# Altium PCB Therm_Expand_GND.PcbDoc
Units mm, origin at the board's own origin, x right, y up, seen from the top; angles counter-clockwise.
Board outline 68.53 x 50.17 mm, 2 copper layers (Top Layer, Bottom Layer); 8 components, 1 nets, 92 pads, 0 vias.
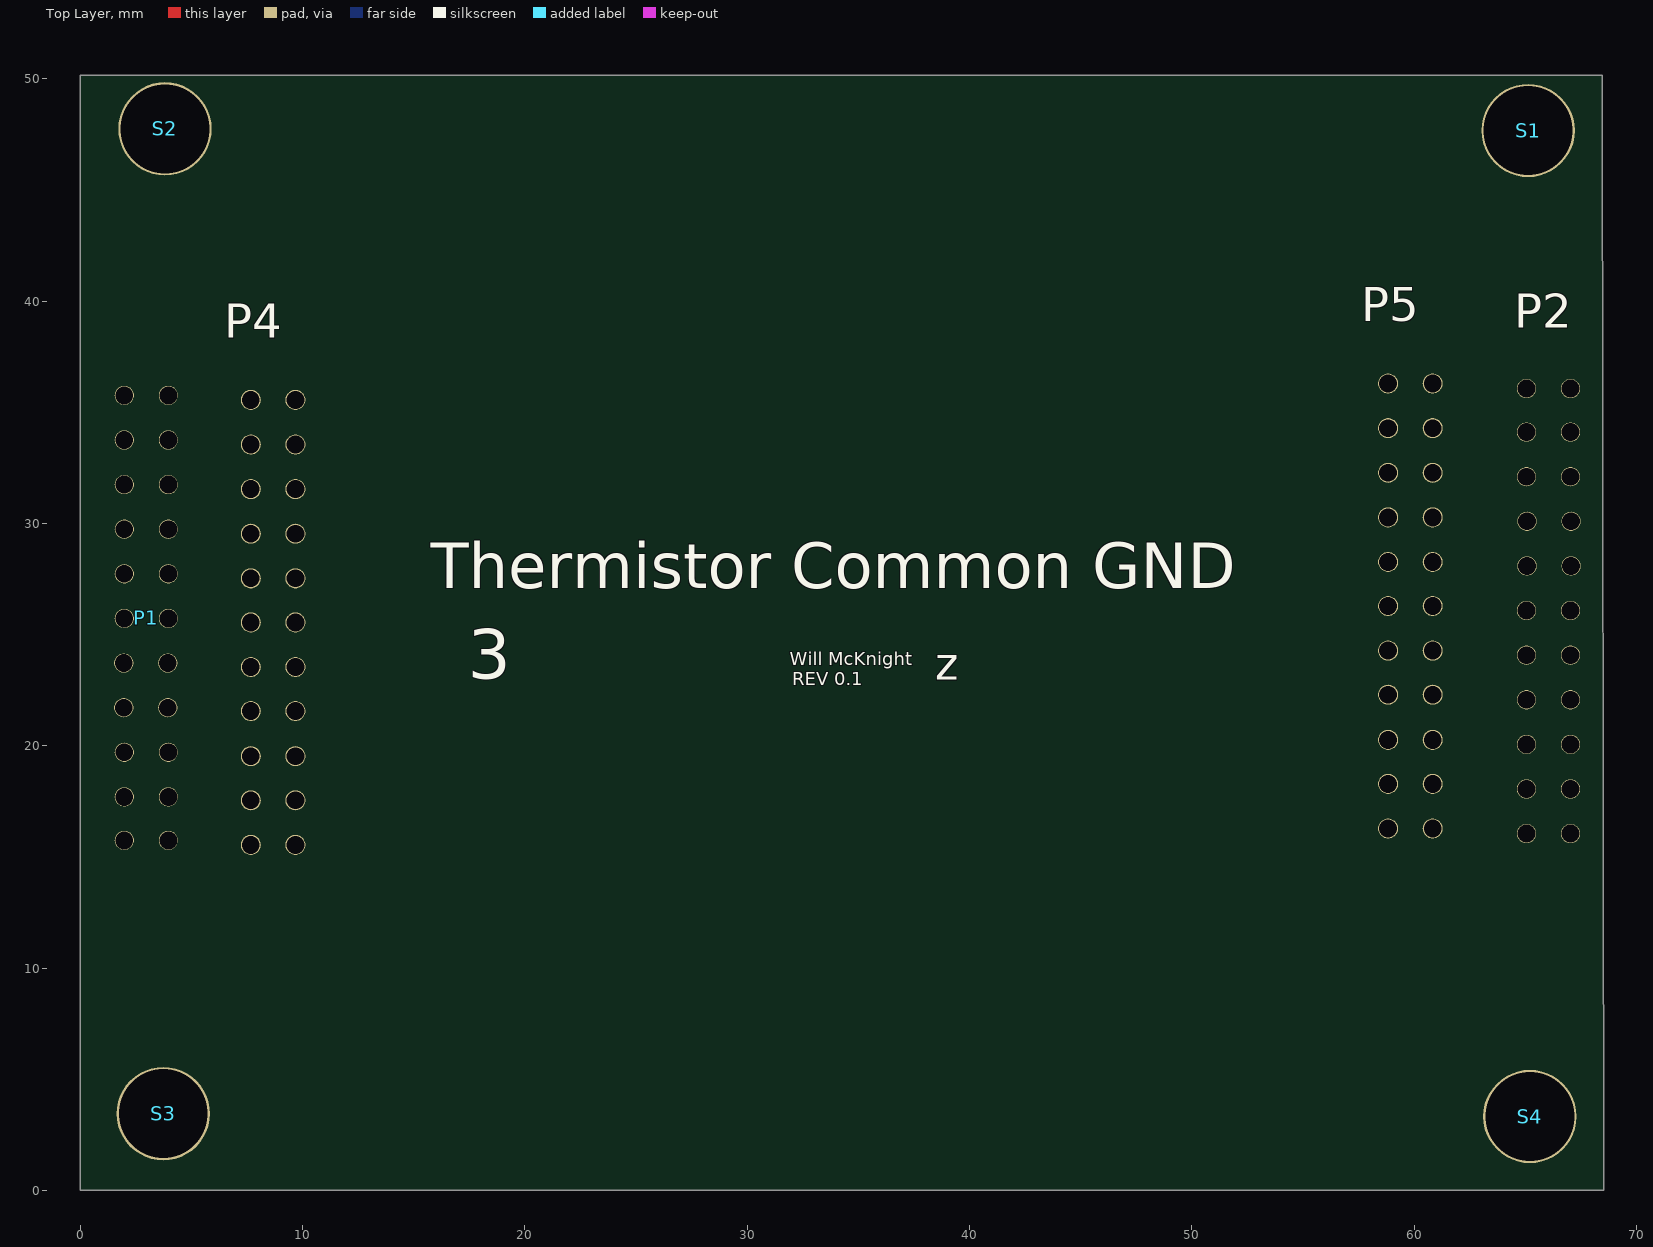
[diagram p0: Top Layer view]
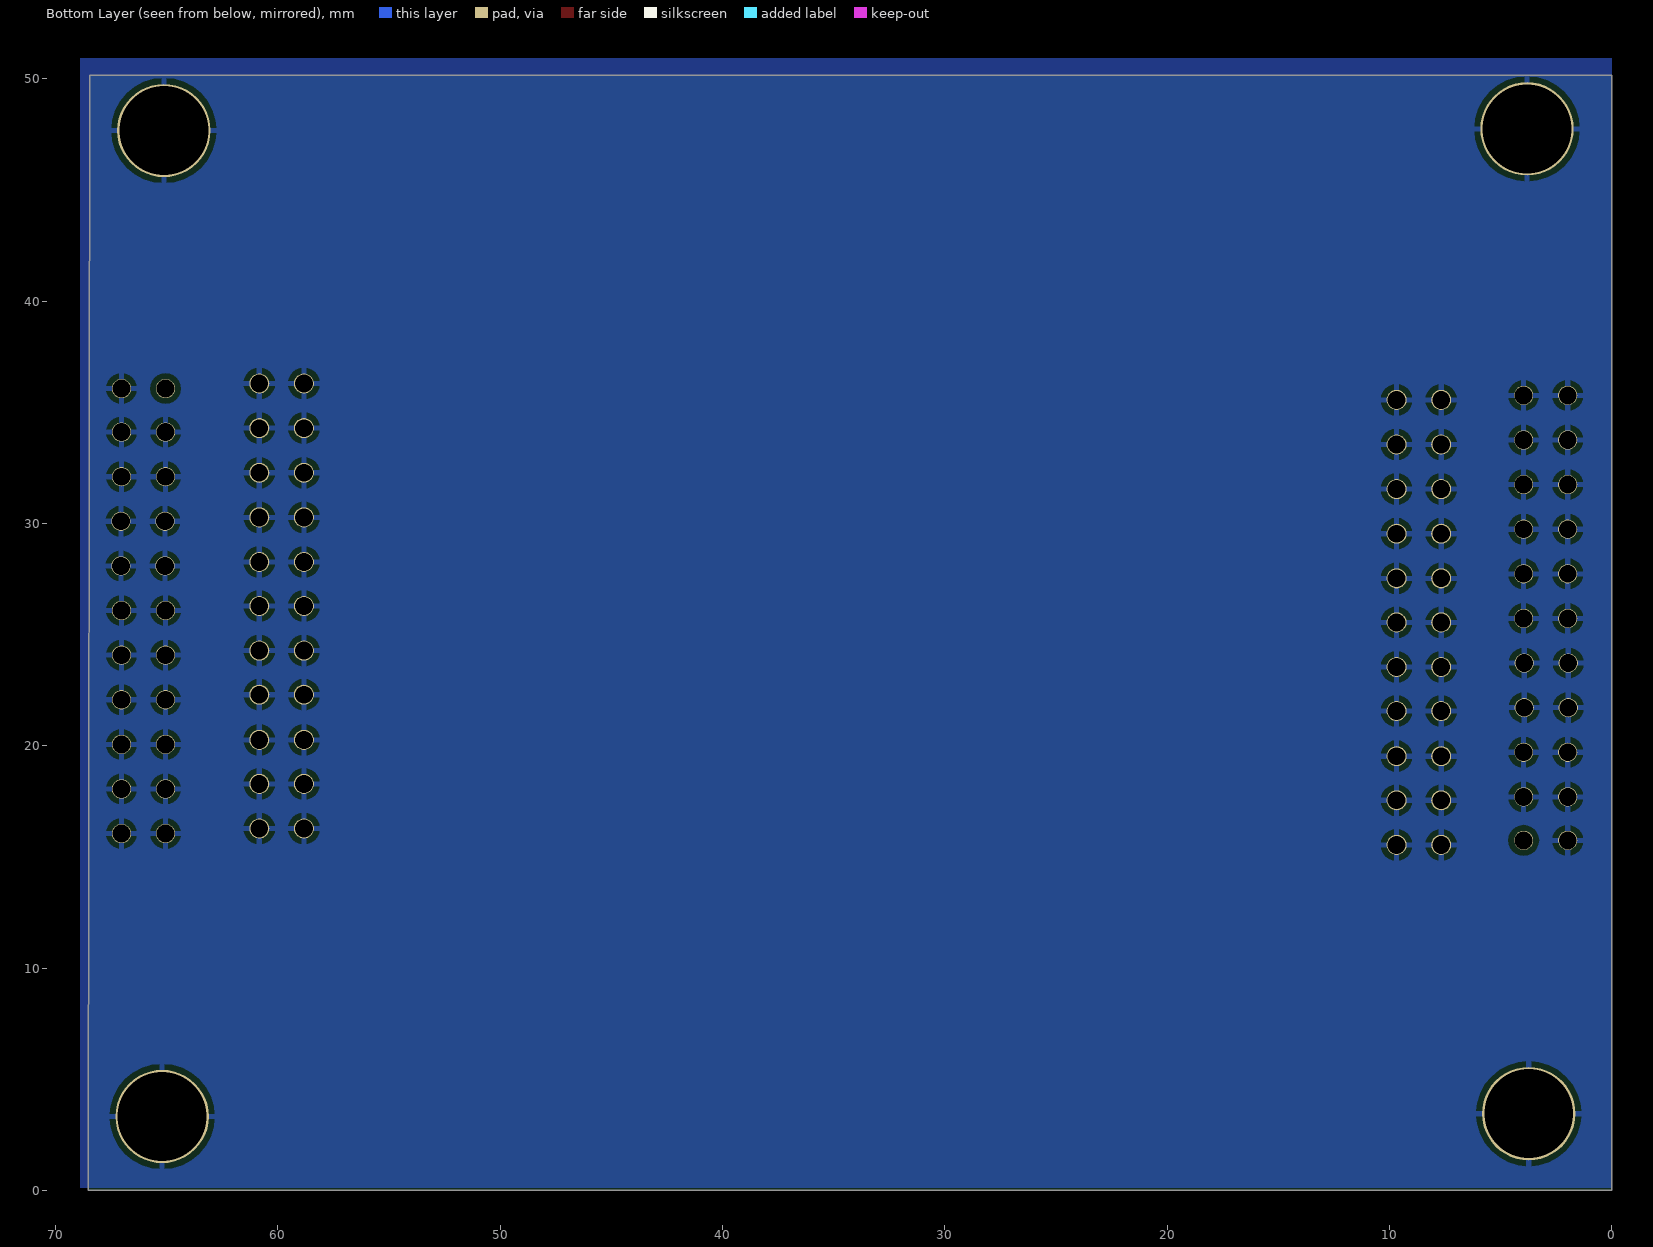
[diagram p1: Bottom Layer view, seen from below]

## Layer stack, top to bottom
Top Solder: solder mask 0.0102, Solder Resist, Dk 3.5
Top Layer: signal copper 0.0356
Dielectric 1: dielectric 0.32, FR-4, Dk 4.8
Bottom Layer: signal copper 0.0356
Bottom Solder: solder mask 0.0102, Solder Resist, Dk 3.5

## Board outline
0,50.165 68.454,50.165 68.529,0 0,0

## Design rules (kind name [scope] priority, off if disabled: settings)
Clearance [All] p1: gap=0.254 ignorepadtopadclearanceinfootprint=FALSE except(0: Arc-Hole Track-Hole SMDPad-Hole THPad-Hole Via-Hole Fill-Hole Poly-Hole Region-Hole Text-Hole)
PolygonConnect [All] p1: connectstyle=Relief reliefconductorwidth=0.254 reliefentries=4 polygonreliefangle="90 Angle" airgapwidth=0.254
RoutingVias [All] p1: holewidth=0.711 width=1.27 viastyle="Through Hole" minholewidth=0.711 minwidth=1.27 maxholewidth=0.711 maxwidth=1.27
SolderMaskExpansion [All] p1: expansion=0.102
Width [All] p1: maxlimit=0.254 minlimit=0.254 preferedwidth=0.254
30 further rules are at their usual default settings.

## Components (designator, comment, footprint, x,y, rotation, side; value= is the part's Value field where it differs from the comment)
P1 "22-Pin-Connector" "22-Pin Conenctor" 346.456,366.395 r90 top
P2 "22-Pin-Connector" "22-Pin Conenctor" -277.444,-314.579 r270 top
P4 "22-Pin-Connector-Recepticle" "22 POS Connector Recepticle" 9.677,15.545 r90 top
P5 "22-Pin-Connector-Recepticle" "22 POS Connector Recepticle" 60.833,16.281 r90 top
S1 "#6-32 Hex Standoff" "#6-32 GND STANDOFF" 65.176,47.625 r0 top
S2 "#6-32 Hex Standoff" "#6-32 GND STANDOFF" 3.861,47.701 r0 top
S3 "#6-32 Hex Standoff" "#6-32 GND STANDOFF" 3.785,3.404 r0 top
S4 "#6-32 Hex Standoff" "#6-32 GND STANDOFF" 65.253,3.277 r0 top

## Footprints (in the part's own frame and the unit in brackets; to place one, negate y for a bottom-side part, rotate by r counter-clockwise, add the part's x,y. Pads: shape width x height; smd on the part's side, far side on the other; paste and mask are expansions set on the pad)
"22 POS Connector Recepticle" [mm]
  round 0.9 hole 0.8: 1(0,0) 2(0,2.007) 3(2.007,2.007) 4(2.007,0) 5(3.988,0) 6(3.988,2.007) 7(6.02,2.007) 8(6.02,0) 9(8.001,0) 10(8.001,2.007) 11(10.008,2.007) 12(10.008,0) 13(11.989,0) 14(11.989,2.007) 15(13.995,2.007) 16(13.995,0) 17(16.002,0) 18(16.002,2.007) 19(18.009,2.007) 20(18.009,0) 21(20.015,0) 22(20.015,2.007)
  body extent -1.95,-1.53 22.05,3.47, height 5.8
"22-Pin Conenctor" [mil]
  round 34 hole 31.5: 1(-13017,13484) 2(-13017,13562) 3(-13096,13484) 4(-13096,13562) 5(-13175,13484) 6(-13175,13562) 7(-13254,13484) 8(-13254,13562) 9(-13333,13484) 10(-13333,13562) 11(-13412,13484) 12(-13412,13562) 13(-13491,13485) 14(-13491,13563) 15(-13570,13485) 16(-13570,13563) 17(-13649,13484) 18(-13649,13562) 19(-13728,13484) 20(-13728,13562) 22(-13805,13562) 51(-13805,13484)
  body extent -13883,13472 -12939,13866, height 199
"#6-32 GND STANDOFF" [mm] "Hex standoff for Thermistor GND PCB"
  round 4.2 hole 4: 1(-0.051,0.051)
  body extent -3.71,-3.12 3.61,3.23, height 12.7

## Part data
P1 P2: Color=Black, Contact Resistance=30mR, Current Rating=2A, Manufacturer=Hirose, Manufacturer Part Number=DF11-22DP-2DS(24), Max Operating Temperature=85°C, Min Operating Temperature=-30°C, Package Quantity=20, Supplier Part Number 1=H10253-ND, Voltage Rating=250V, ComponentLink1Description=http://docs-usa.electrocomponents.com/techlib:/itc_doclist_US.htm?stockno=6888963&src-supplier=Allied+Electronics, ComponentLink1URL=http://docs-usa.electrocomponents.com/techlib:/itc_doclist_US.htm?stockno=6888963&src-supplier=Allied+Electronics, ComponentLink2Description=https://www.verical.com/server-webapp/html/getDatasheet?partID=456315&src-supplier=Verical, ComponentLink2URL=https://www.verical.com/server-webapp/html/getDatasheet?partID=456315&src-supplier=Verical, ComponentLink3Description=http://www.hirose.co.jp/cataloge_hp/en_DF11_20130411.pdf?src-supplier=Future+Electronics, ComponentLink3URL=http://www.hirose.co.jp/cataloge_hp/en_DF11_20130411.pdf?src-supplier=Future+Electronics, ComponentLink4Description=http://www.farnell.com/datasheets/91550.pdf?src-supplier=Element14, ComponentLink4URL=http://www.farnell.com/datasheets/91550.pdf?src-supplier=Element14, ComponentLink5Description=http://www.mouser.com/ds/2/185/DF11_catalog-1064296.pdf?src-supplier=Mouser, ComponentLink5URL=http://www.mouser.com/ds/2/185/DF11_catalog-1064296.pdf?src-supplier=Mouser, ComponentLink6Description=http://documents.rs-components.com/techlib://itc_doclist_GB.htm?stockno=6056598&src-supplier=RSComponents, ComponentLink6URL=http://documents.rs-components.com/techlib://itc_doclist_GB.htm?stockno=6056598&src-supplier=RSComponents, Connector Type="Male Pin", Contact Material="Brass,Copper Alloy,Tin", Contact Mating Length=0.118inch, Contact Plating=Tin, Depth=10mm, Fastening Type=Detent, Gender=Male, Height=5mm, Housing Color=Black, Housing Material=Polyamide, Lead Free="Lead Free", Length=24mm, Max Current Rating=2A, Mount="Through Hole", Number of Contacts=22, Number of Positions=22, Number of Rows=2, Orientation="Right Angle", Packaging=Rail/Tube, Pitch=2mm, Pricing 1="1=1.19, 20=1.0455, 100=0.902, 500=0.738, 1000=0.656 (USD)", Radiation Hardening=No, Row Spacing=0.079inch, Stock 1=536, Supplier 1=Digi-Key, System=Connector, Termination=Solder
P4 P5: Color=Black, Contact Resistance=30mR, Current Rating=2A, Flammability Rating="UL94 V-0", Insulation Resistance=1GR, Manufacturer=Hirose, Manufacturer Part Number=DF11-22DS-2DSA(05), Package Quantity=100, Supplier Part Number 1=H10177-ND, Voltage Rating (AC)=30V, ComponentLink1Description=https://datasheet.ciiva.com/11752/0900766b80d975f3-11752361.pdf?src-supplier=RSComponents, ComponentLink1URL=https://datasheet.ciiva.com/11752/0900766b80d975f3-11752361.pdf?src-supplier=RSComponents, ComponentLink2Description=https://datasheet.ciiva.com/14122/df11serie-eng-tds-14122182.pdf?src-supplier=Distrelec, ComponentLink2URL=https://datasheet.ciiva.com/14122/df11serie-eng-tds-14122182.pdf?src-supplier=Distrelec, ComponentLink3Description=https://datasheet.ciiva.com/5155/en-df11-20130411-258217-5155093.pdf?src-supplier=Mouser, ComponentLink3URL=https://datasheet.ciiva.com/5155/en-df11-20130411-258217-5155093.pdf?src-supplier=Mouser, Connector Type=Receptacle, Contact Gender=Female, Contact Material=Copper, Contact Plating=Tin, Gender=Receptacle, Housing Color=Black, Housing Material=Polyamide, Lead Free="Lead Free", Lead Pitch=2mm, Mating Cycles=30, Mount="Through Hole", Number of Contacts=22, Number of Positions=22, Number of Rows=2, Orientation=Straight, Packaging=Bulk, Pitch=2mm, Pricing 1="1=1.40000, 10=1.27400, 100=1.09200, 500=0.91000, 1000=0.78000 (USD)", REACH SVHC="No SVHC", RoHS=Yes, Row Spacing=0.079inch, Stock 1=843, Supplier 1=Digi-Key, Termination="Through Hole"
S1 S2 S3 S4: "Hex standoff for Thermistor GND Board", Case/Package=Aluminum, Manufacturer=RAF, Manufacturer Part Number=2104-632-AL, Supplier Part Number 1=1772-1401-ND, ComponentLink1Description=https://datasheet.ciiva.com/18425/70006493-18425850.pdf?src-supplier=Allied+Electronics, ComponentLink1URL=https://datasheet.ciiva.com/18425/70006493-18425850.pdf?src-supplier=Allied+Electronics, ComponentLink2Description=https://datasheet.ciiva.com/30059/2101-1032-b-5-30059595.pdf?src-supplier=Onlinecomponents.com, ComponentLink2URL=https://datasheet.ciiva.com/30059/2101-1032-b-5-30059595.pdf?src-supplier=Onlinecomponents.com, Gender="Female to Female", Length=0.5inch, Material=Aluminium, Pricing 1="1=0.26000, 25=0.17400, 100=0.14820, 250=0.14080, 500=0.13338, 1000=0.12597 (USD)", RoHS=Yes, Shape=Hex, Stock 1=3884, Supplier 1=Digi-Key

## Nets (pads, with @x,y where several pads share a name; then routed paths per layer and width w, separated by ;. In a path a pad name is that pad's centre, name@x,y a point inside that pad or via, vN(x,y) a via of type N, cw(c..) or ccw(c..) an arc to the next point about the centre after c; other vN are vias at no path point)
GND: P1.1 P1.2 P1.3 P1.4 P1.5 P1.6 P1.7 P1.8 P1.9 P1.10 P1.11 P1.12 P1.13 P1.14 P1.15 P1.16 P1.17 P1.18 P1.19 P1.20 P1.22 P2.1 P2.2 P2.3 P2.4 P2.5 P2.6 P2.7 P2.8 P2.9 P2.10 P2.11 P2.12 P2.13 P2.14 P2.15 P2.16 P2.17 P2.18 P2.19 P2.20 P2.22 P4.1 P4.2 P4.3 P4.4 P4.5 P4.6 P4.7 P4.8 P4.9 P4.10 P4.11 P4.12 P4.13 P4.14 P4.15 P4.16 P4.17 P4.18 P4.19 P4.20 P4.21 P4.22 P5.1 P5.2 P5.3 P5.4 P5.5 P5.6 P5.7 P5.8 P5.9 P5.10 P5.11 P5.12 P5.13 P5.14 P5.15 P5.16 P5.17 P5.18 P5.19 P5.20 P5.21 P5.22 S1.1 S2.1 S3.1 S4.1
pads on no net: P1.51 P2.51

## Polygon pours and split planes (outlines as drawn)
GND on Bottom Layer "GND" (solid, remove dead copper, pour order 8): 68.885,50.927 68.885,0.127 0,0.127 0,50.927
no net on Bottom Layer "GND" (solid, remove dead copper, pour order 10): 141.757,95.529
no net on Bottom Layer "GND" (solid, remove dead copper, pour order 4): 107.798,73.127

## Silkscreen, mask and mechanical layers (free items; w line width, h text height)
Top Overlay:
  text "Thermistor Common GND" at 15.773,26.416 h3.5
  text "Will McKnight" at 31.902,23.419 h1
  text "REV 0.1" at 32.029,22.53 h1
  text "z" at 38.456,22.479 h2.5
  text "3" at 17.424,22.276 h3.81
GND Board Outline:
  lines w0.25: 148.996,95.504 149.606,95.504 149.606,44.704 80.721,44.704 80.721,95.504 149.098,95.504